# EAGLE board export_eagle_panel (EAGLE 7.5.0)
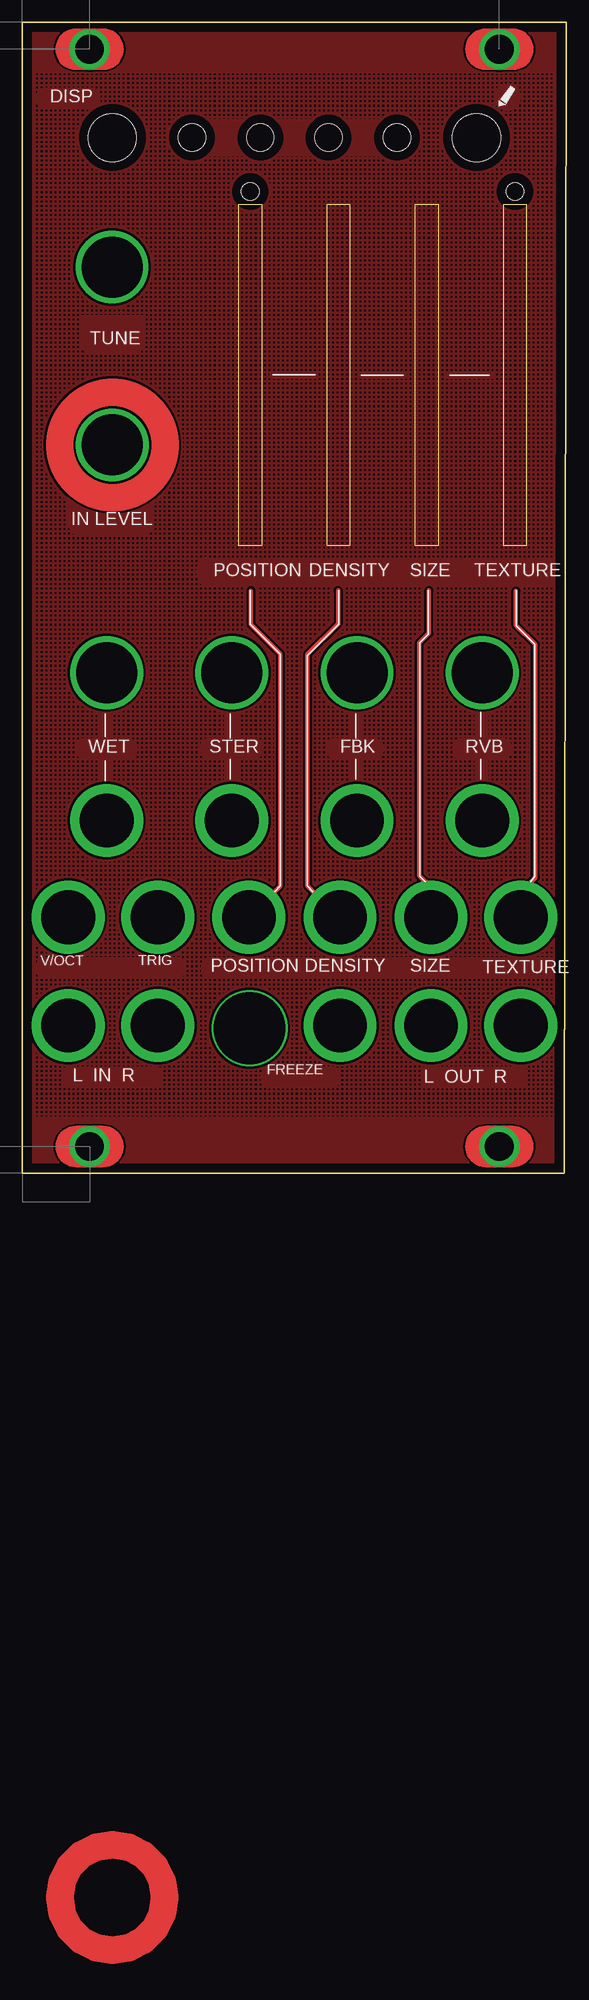
[diagram p0: board, top side]
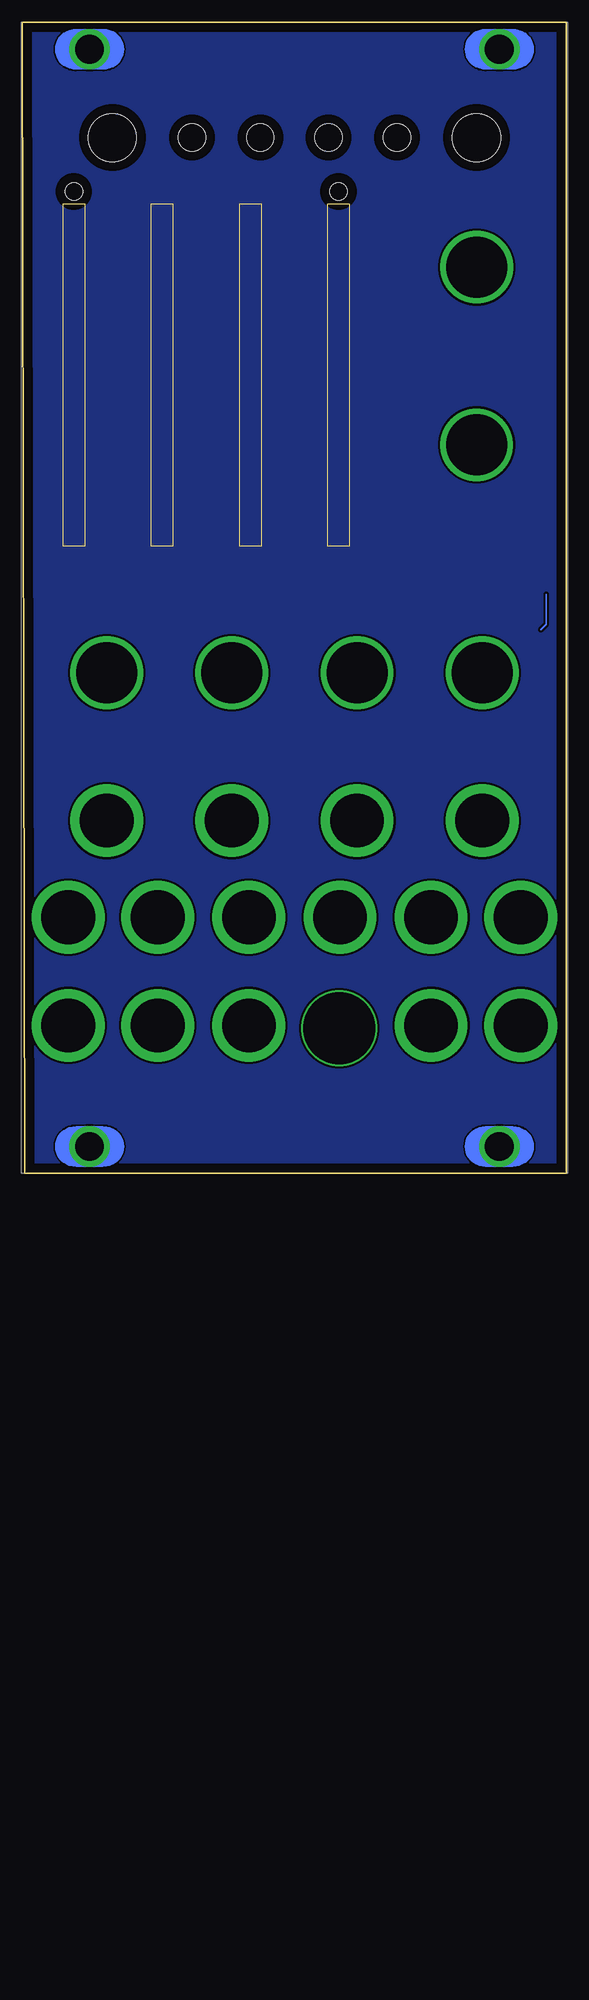
[diagram p1: board, bottom side, seen from below]

Size 60.71 x 128.42 mm. Coordinates in mm from the lower left corner, seen from the top.
Outline: 60.45,0 60.71,128.42 0,128.42 0,0 60.45,0
Copper layers (1*16): Top 0.035mm / dielectric 1.5mm / Bottom 0.035mm
Design rules "default *": minimum track width 10mil, minimum drill 0.61mm, track to track 8mil, track to pad 8mil, pad to pad 8mil, via to via 8mil, smd to smd 8mil, copper to edge 40mil, drill to drill 8mil, minimum pad ring 0mil, minimum via ring 8mil, stop-mask expansion 4mil, vias tented up to drill 15mil, thermal gap 10mil
Net classes: 0 default: width 0.178 mm, drill 0.3 mm, clearance 0.152 mm, clearance 0.152 mm to class 1, clearance 0.152 mm to class 2; 1 hipriority: width 0.178 mm, drill 0.3 mm, clearance 0.152 mm, clearance 0.152 mm to class 0, clearance 0.152 mm to class 2; 2 powa: width 0.381 mm, drill 0.3 mm, clearance 0.152 mm, clearance 0.152 mm to class 0, clearance 0.152 mm to class 1
Holes 3.05 mm at 34.16,115.57 26.54,115.57 18.92,115.57 41.78,115.57
Holes 5.38 mm at 10.03,115.57 50.67,115.57
Holes 2 mm at 25.43,109.56 54.96,109.56
Milling: 16 lines

## Footprints (pad centres in the part's own frame; a part is rotated, then mirrored left to right if it is on the bottom)
RES_0805 = drill 6 pad 8.128: 1 0,0
Pad = drill 3.2 pad 4.5: 1 0,0
RES_0805_Pad12 = drill 8 pad 8.5: 1 0,0
RES_0805_Pad21 = drill 6.8 pad 8.128: 1 0,0

## Placement (x,y rotation side)
Pad1  [RES_0805]  45.59,16.51 0 top
Pad2  [RES_0805]  15.11,16.51 0 top
Pad3  [RES_0805]  5.11,16.51 0 top
Pad4  [RES_0805]  5.11,28.6 0 top
Pad5  [RES_0805]  15.11,28.57 0 top
Pad6  [RES_0805]  35.43,16.51 0 top
Pad7  [RES_0805]  25.27,28.57 0 top
Pad8  [RES_0805]  35.43,28.57 0 top
Pad9  [RES_0805]  45.59,28.57 0 top
Pad10  [Pad]  53.21,3 0 top
Pad11  [Pad]  7.49,3 0 top
Pad12  [RES_0805_Pad12]  25.35,16.21 0 top
Pad13  [Pad]  7.49,125.43 0 top
Pad14  [Pad]  53.21,125.43 0 top
Pad15  [RES_0805]  55.6,28.57 0 top
Pad16  [RES_0805]  55.59,16.51 0 top
Pad17  [RES_0805]  9.4,39.37 0 top
Pad18  [RES_0805]  23.37,39.37 0 top
Pad19  [RES_0805]  37.34,39.37 0 top
Pad20  [RES_0805]  51.31,39.37 0 top
Pad21  [RES_0805_Pad21]  9.4,55.88 0 top
Pad22  [RES_0805_Pad21]  23.37,55.88 0 top
Pad23  [RES_0805_Pad21]  37.34,55.88 0 top
Pad24  [RES_0805_Pad21]  51.31,55.88 0 top
Pad25  [RES_0805_Pad21]  10,101.12 0 top
Pad26  [RES_0805_Pad21]  10.03,81.28 0 top

## Library data of the parts
Pad1-Pad26 = common

## Nets
Net_1: Pad7.1
Net_2: Pad8.1
Net_3: Pad9.1
Net_4: Pad15.1

## Tracks (layer width: path | path; a pad name or v marks a point on that pad's centre or on a via)
N$1
  pour Top (no thermals): 27.66,89.44 32.92,89.44 32.92,88.67 27.66,88.67
N$2
  pour Top (no thermals): 37.53,89.42 42.79,89.42 42.79,88.66 37.53,88.66
N$3
  pour Top (no thermals): 47.33,89.42 52.59,89.42 52.59,88.65 47.33,88.65
N$4
  pour Bottom (isolate 0.229): 59.93,0.52 60.18,127.9 0.52,127.9 0.52,0.52
N$5
  pour Top (isolate 0.254, hatched): 59.92,0.53 60.17,127.89 0.53,127.89 0.53,0.53
N$6
  pour Top (isolate 0.33): 0.48,127.98 60.23,127.98 60.23,122.84 0.48,122.84
N$7
  pour Top (isolate 0.254): 0.48,6.22 0.48,0.44 60.07,0.44 59.92,6.22
Net_0
  Bottom 0.178: 2.25,64.61 2.25,61.28 2.89,60.64
  pour Top (no thermals): 8.6,51.43 10.03,51.43 10.03,43.82 8.6,43.82
  pour Top (no thermals): 22.57,51.43 24,51.43 24,43.82 22.57,43.82
  pour Top (no thermals): 36.54,51.43 37.97,51.43 37.97,43.82 36.54,43.82
  pour Top (no thermals): 50.51,51.43 51.94,51.43 51.94,43.82 50.51,43.82
  pour Top (no thermals): 7.02,48.58 11.62,48.58 11.62,46.2 7.02,46.2
  pour Top (no thermals): 20.83,48.58 25.75,48.58 25.75,46.2 20.83,46.2
  pour Top (no thermals): 34.96,48.58 39.24,48.58 39.24,46.2 34.96,46.2
  pour Top (no thermals): 49.09,48.58 53.37,48.58 53.37,46.2 49.09,46.2
  pour Top (no thermals): 2.73,121.13 7.65,121.13 7.65,118.75 2.73,118.75
  pour Top (no thermals): 18.76,117.62 41.78,117.62 41.78,113.5 18.76,113.5
  pour Top (no thermals): 6.38,95.73 13.68,95.73 13.68,92.87 6.38,92.87
  pour Top (no thermals): 5.11,78.1 14.64,78.1 14.64,72.55 5.11,72.55
  pour Top: 20.83,115.57 20.73,116.21 20.45,116.78 20.01,117.24 19.46,117.53 18.84,117.63 18.23,117.53 17.68,117.24 17.24,116.78 16.96,116.21 16.86,115.57 16.96,114.93 17.24,114.36 17.68,113.9 18.23,113.61 18.84,113.51 19.46,113.61 20.01,113.9 20.45,114.36 20.73,114.93
  pour Top: 43.85,115.57 43.75,116.21 43.45,116.78 43,117.24 42.42,117.53 41.78,117.63 41.15,117.53 40.57,117.24 40.11,116.78 39.82,116.21 39.72,115.57 39.82,114.93 40.11,114.36 40.57,113.9 41.15,113.61 41.78,113.51 42.42,113.61 43,113.9 43.45,114.36 43.75,114.93
  pour Top: 12.89,47.39 12.84,47.75 12.68,48.09 12.43,48.35 12.12,48.52 11.78,48.58 11.44,48.52 11.13,48.35 10.88,48.09 10.72,47.75 10.67,47.39 10.72,47.02 10.88,46.69 11.13,46.42 11.44,46.25 11.78,46.2 12.12,46.25 12.43,46.42 12.68,46.69 12.84,47.02
  pour Top: 8.13,47.39 8.07,47.75 7.92,48.09 7.67,48.35 7.36,48.52 7.02,48.58 6.67,48.52 6.36,48.35 6.12,48.09 5.96,47.75 5.91,47.39 5.96,47.02 6.12,46.69 6.36,46.42 6.67,46.25 7.02,46.2 7.36,46.25 7.67,46.42 7.92,46.69 8.07,47.02
  pour Top: 21.94,47.39 21.89,47.75 21.73,48.09 21.48,48.35 21.17,48.52 20.83,48.58 20.48,48.52 20.18,48.35 19.93,48.09 19.77,47.75 19.72,47.39 19.77,47.02 19.93,46.69 20.18,46.42 20.48,46.25 20.83,46.2 21.17,46.25 21.48,46.42 21.73,46.69 21.89,47.02
  pour Top: 26.86,47.39 26.81,47.75 26.65,48.09 26.4,48.35 26.09,48.52 25.75,48.58 25.41,48.52 25.1,48.35 24.85,48.09 24.69,47.75 24.64,47.39 24.69,47.02 24.85,46.69 25.1,46.42 25.41,46.25 25.75,46.2 26.09,46.25 26.4,46.42 26.65,46.69 26.81,47.02
  pour Top: 36.07,47.39 36.01,47.75 35.86,48.09 35.61,48.35 35.3,48.52 34.96,48.58 34.61,48.52 34.3,48.35 34.06,48.09 33.9,47.75 33.84,47.39 33.9,47.02 34.06,46.69 34.3,46.42 34.61,46.25 34.96,46.2 35.3,46.25 35.61,46.42 35.86,46.69 36.01,47.02
  pour Top: 40.35,47.39 40.3,47.75 40.14,48.09 39.9,48.35 39.59,48.52 39.24,48.58 38.9,48.52 38.59,48.35 38.34,48.09 38.19,47.75 38.13,47.39 38.19,47.02 38.34,46.69 38.59,46.42 38.9,46.25 39.24,46.2 39.59,46.25 39.9,46.42 40.14,46.69 40.3,47.02
  pour Top: 50.2,47.39 50.14,47.75 49.98,48.09 49.74,48.35 49.43,48.52 49.09,48.58 48.74,48.52 48.43,48.35 48.19,48.09 48.03,47.75 47.97,47.39 48.03,47.02 48.19,46.69 48.43,46.42 48.74,46.25 49.09,46.2 49.43,46.25 49.74,46.42 49.98,46.69 50.14,47.02
  pour Top: 54.64,47.39 54.59,47.75 54.43,48.09 54.18,48.35 53.87,48.52 53.53,48.58 53.19,48.52 52.88,48.35 52.63,48.09 52.47,47.75 52.42,47.39 52.47,47.02 52.63,46.69 52.88,46.42 53.19,46.25 53.53,46.2 53.87,46.25 54.18,46.42 54.43,46.69 54.59,47.02
  pour Top: 21.62,67.15 21.57,67.64 21.41,68.08 21.16,68.44 20.85,68.66 20.51,68.74 20.17,68.66 19.86,68.44 19.61,68.08 19.45,67.64 19.4,67.15 19.45,66.66 19.61,66.22 19.86,65.87 20.17,65.64 20.51,65.56 20.85,65.64 21.16,65.87 21.41,66.22 21.57,66.66
  pour Top (no thermals): 5.43,11.91 14.64,11.91 14.64,9.53 5.43,9.53
  pour Top: 6.54,10.72 6.49,11.08 6.33,11.41 6.08,11.68 5.77,11.85 5.43,11.91 5.09,11.85 4.78,11.68 4.53,11.41 4.37,11.08 4.32,10.72 4.37,10.35 4.53,10.02 4.78,9.75 5.09,9.58 5.43,9.53 5.77,9.58 6.08,9.75 6.33,10.02 6.49,10.35
  pour Top: 15.75,10.72 15.69,11.08 15.54,11.41 15.29,11.68 14.98,11.85 14.64,11.91 14.29,11.85 13.98,11.68 13.74,11.41 13.58,11.08 13.53,10.72 13.58,10.35 13.74,10.02 13.98,9.75 14.29,9.58 14.64,9.53 14.98,9.58 15.29,9.75 15.54,10.02 15.69,10.35
  pour Top (no thermals): 27.65,11.91 34.32,11.91 34.32,9.53 27.65,9.53
  pour Top (no thermals): 44.48,11.91 56.07,11.91 56.07,9.53 44.48,9.53
  pour Top: 28.77,10.72 28.71,11.08 28.55,11.41 28.31,11.68 28,11.85 27.65,11.91 27.31,11.85 27,11.68 26.76,11.41 26.6,11.08 26.54,10.72 26.6,10.35 26.76,10.02 27,9.75 27.31,9.58 27.65,9.53 28,9.58 28.31,9.75 28.55,10.02 28.71,10.35
  pour Top: 35.43,10.72 35.38,11.08 35.22,11.41 34.98,11.68 34.66,11.85 34.32,11.91 33.98,11.85 33.67,11.68 33.42,11.41 33.27,11.08 33.21,10.72 33.27,10.35 33.42,10.02 33.67,9.75 33.98,9.58 34.32,9.53 34.66,9.58 34.98,9.75 35.22,10.02 35.38,10.35
  pour Top: 3.68,22.94 3.63,23.31 3.47,23.64 3.23,23.9 2.92,24.07 2.57,24.13 2.23,24.07 1.92,23.9 1.67,23.64 1.52,23.31 1.46,22.94 1.52,22.57 1.67,22.24 1.92,21.98 2.23,21.81 2.57,21.75 2.92,21.81 3.23,21.98 3.47,22.24 3.63,22.57
  pour Top: 18.29,22.94 18.23,23.31 18.08,23.64 17.83,23.9 17.52,24.07 17.18,24.13 16.83,24.07 16.52,23.9 16.28,23.64 16.12,23.31 16.07,22.94 16.12,22.57 16.28,22.24 16.52,21.98 16.83,21.81 17.18,21.75 17.52,21.81 17.83,21.98 18.08,22.24 18.23,22.57
  pour Top: 22.1,22.94 22.04,23.31 21.89,23.64 21.64,23.9 21.33,24.07 20.99,24.13 20.64,24.07 20.33,23.9 20.09,23.64 19.93,23.31 19.88,22.94 19.93,22.57 20.09,22.24 20.33,21.98 20.64,21.81 20.99,21.75 21.33,21.81 21.64,21.98 21.89,22.24 22.04,22.57
  pour Top (no thermals): 20.99,24.13 60.04,24.13 60.04,21.75 20.99,21.75
  pour Top (no thermals): 2.57,24.13 17.18,24.13 17.18,21.75 2.57,21.75
  pour Top (no thermals): 7.33,93.98 12.73,93.98 12.73,91.6 7.33,91.6
  pour Top: 8.6,92.79 8.55,93.16 8.39,93.49 8.15,93.75 7.84,93.92 7.49,93.98 7.15,93.92 6.84,93.75 6.59,93.49 6.44,93.16 6.38,92.79 6.44,92.42 6.59,92.09 6.84,91.83 7.15,91.66 7.49,91.6 7.84,91.66 8.15,91.83 8.39,92.09 8.55,92.42
  pour Top: 13.68,92.79 13.63,93.16 13.47,93.49 13.23,93.75 12.92,93.92 12.57,93.98 12.23,93.92 11.92,93.75 11.67,93.49 11.52,93.16 11.46,92.79 11.52,92.42 11.67,92.09 11.92,91.83 12.23,91.66 12.57,91.6 12.92,91.66 13.23,91.83 13.47,92.09 13.63,92.42
  pour Top: 7.33,72.47 7.28,72.84 7.12,73.17 6.88,73.43 6.57,73.6 6.22,73.66 5.88,73.6 5.57,73.43 5.32,73.17 5.17,72.84 5.11,72.47 5.17,72.1 5.32,71.77 5.57,71.51 5.88,71.34 6.22,71.28 6.57,71.34 6.88,71.51 7.12,71.77 7.28,72.1
  pour Top: 14.64,72.47 14.58,72.84 14.43,73.17 14.18,73.43 13.87,73.6 13.53,73.66 13.18,73.6 12.87,73.43 12.63,73.17 12.47,72.84 12.41,72.47 12.47,72.1 12.63,71.77 12.87,71.51 13.18,71.34 13.53,71.28 13.87,71.34 14.18,71.51 14.43,71.77 14.58,72.1
  pour Top (no thermals): 6.06,73.66 13.68,73.66 13.68,71.28 6.06,71.28
  pour Top: 3.68,119.94 3.63,120.3 3.47,120.63 3.23,120.9 2.92,121.07 2.57,121.13 2.23,121.07 1.92,120.9 1.67,120.63 1.52,120.3 1.46,119.94 1.52,119.57 1.67,119.24 1.92,118.97 2.23,118.8 2.57,118.74 2.92,118.8 3.23,118.97 3.47,119.24 3.63,119.57
  pour Top: 8.76,119.94 8.71,120.3 8.55,120.63 8.31,120.9 8,121.07 7.65,121.13 7.31,121.07 7,120.9 6.75,120.63 6.6,120.3 6.54,119.94 6.6,119.57 6.75,119.24 7,118.97 7.31,118.8 7.65,118.74 8,118.8 8.31,118.97 8.55,119.24 8.71,119.57
  pour Top: 55.59,120.09 55.52,120.56 55.31,120.98 54.97,121.31 54.55,121.53 54.09,121.6 53.62,121.53 53.2,121.31 52.87,120.98 52.65,120.56 52.58,120.09 52.65,119.63 52.87,119.21 53.2,118.87 53.62,118.66 54.09,118.59 54.55,118.66 54.97,118.87 55.31,119.21 55.52,119.63
  pour Top (isolate 0.254): 20.64,68.61 59.91,68.61 59.91,65.69 20.64,65.68
Net_1
  Top 0.508: 25.49,65.03 25.49,61.25 28.75,58 28.75,32.05 Pad7.1
Net_2
  Top 0.508: 35.21,65.06 35.21,61.33 31.79,57.91 31.79,32.1 35.32,28.57 Pad8.1
Net_3
  Top 0.508: Pad9.1 45.59,31.9 44.3,33.19 44.3,59.21 45.34,60.25 45.34,65.06
Net_4
  Top 0.508: Pad15.1 55.6,31.38 57.23,33.01 57.23,59.02 55.06,61.18 55.06,65.01
  Top 3.048: 15.91,-80.79 15.62,-82.61 14.79,-84.25 13.49,-85.55 11.85,-86.39 10.03,-86.68 8.22,-86.39 6.58,-85.55 5.28,-84.25 4.45,-82.61 4.16,-80.79 4.45,-78.97 5.28,-77.33 6.58,-76.02 8.22,-75.19 10.03,-74.9 11.85,-75.19 13.49,-76.02 14.79,-77.33 15.62,-78.97 15.91,-80.79
(copper drawn outside any net)
  shapes: Top circle x1

## Text on the board
tPlace: DISP | TUNE | IN LEVEL | POSITION | DENSITY | SIZE | TEXTURE | WET | STER | FBK | RVB | V/OCT | TRIG | POSITION | DENSITY | SIZE | TEXTURE | L IN R | FREEZE | L OUT R
tStop: M O N S O O N | Jak Plugg | N